# Allegro board front-cover-dvt-0427.brd
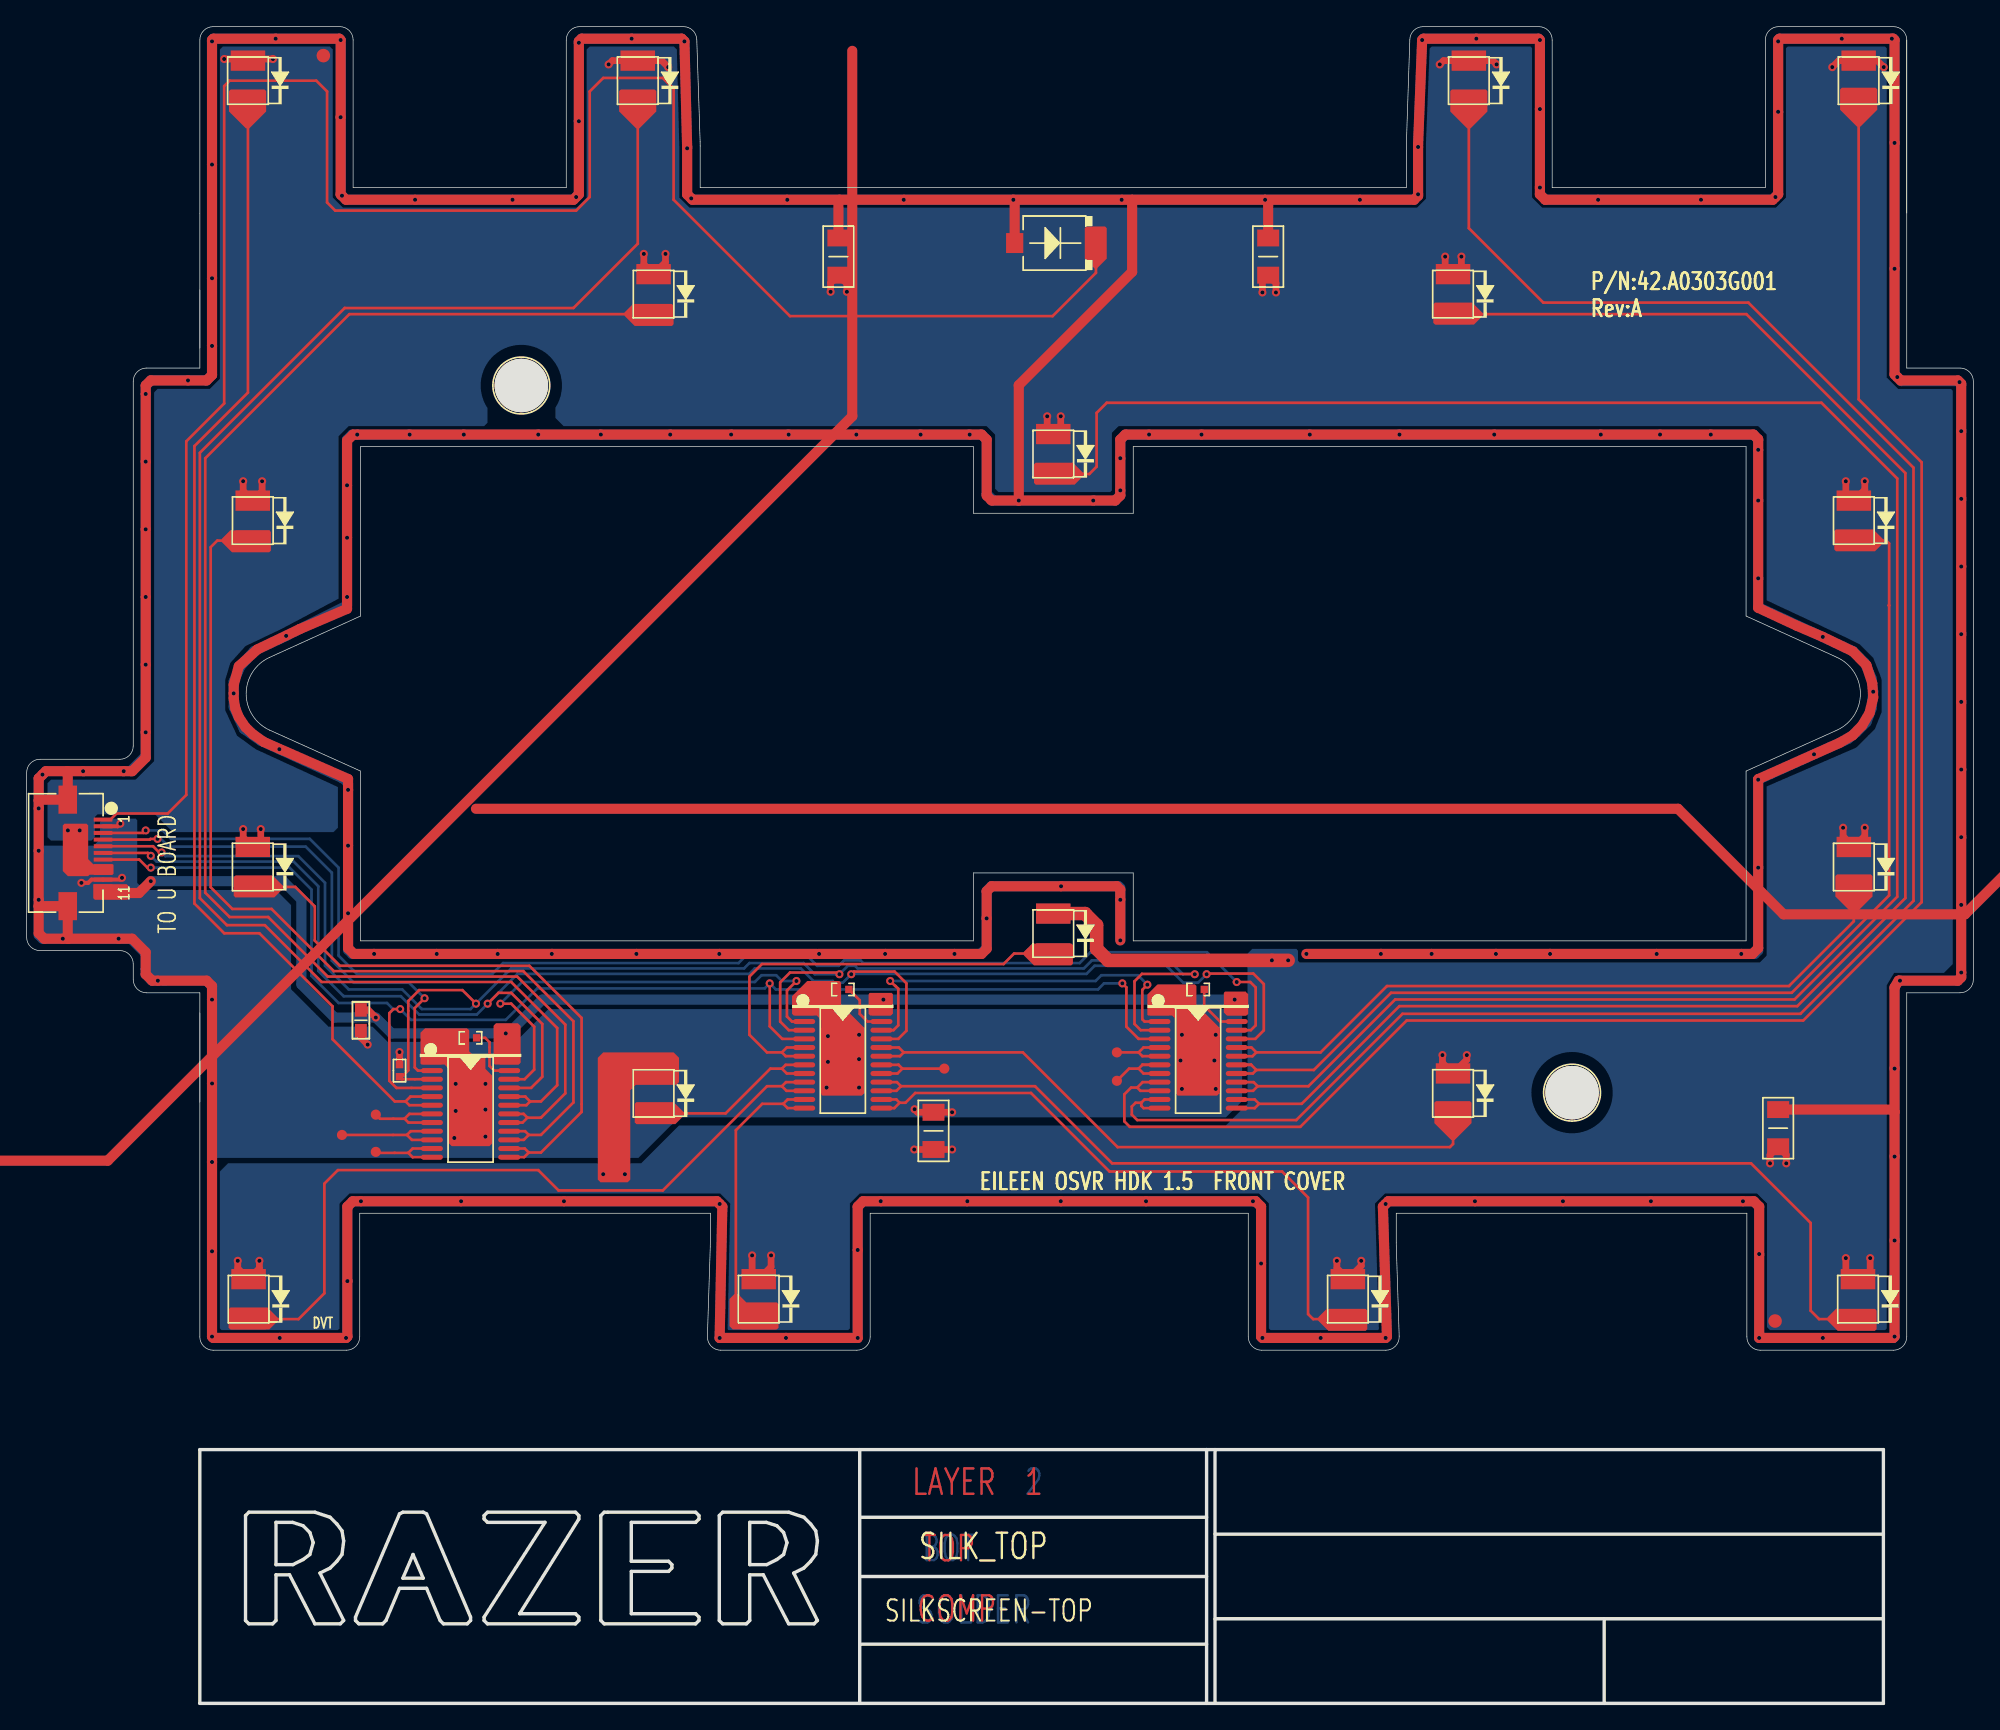
[diagram p0: board, top side]
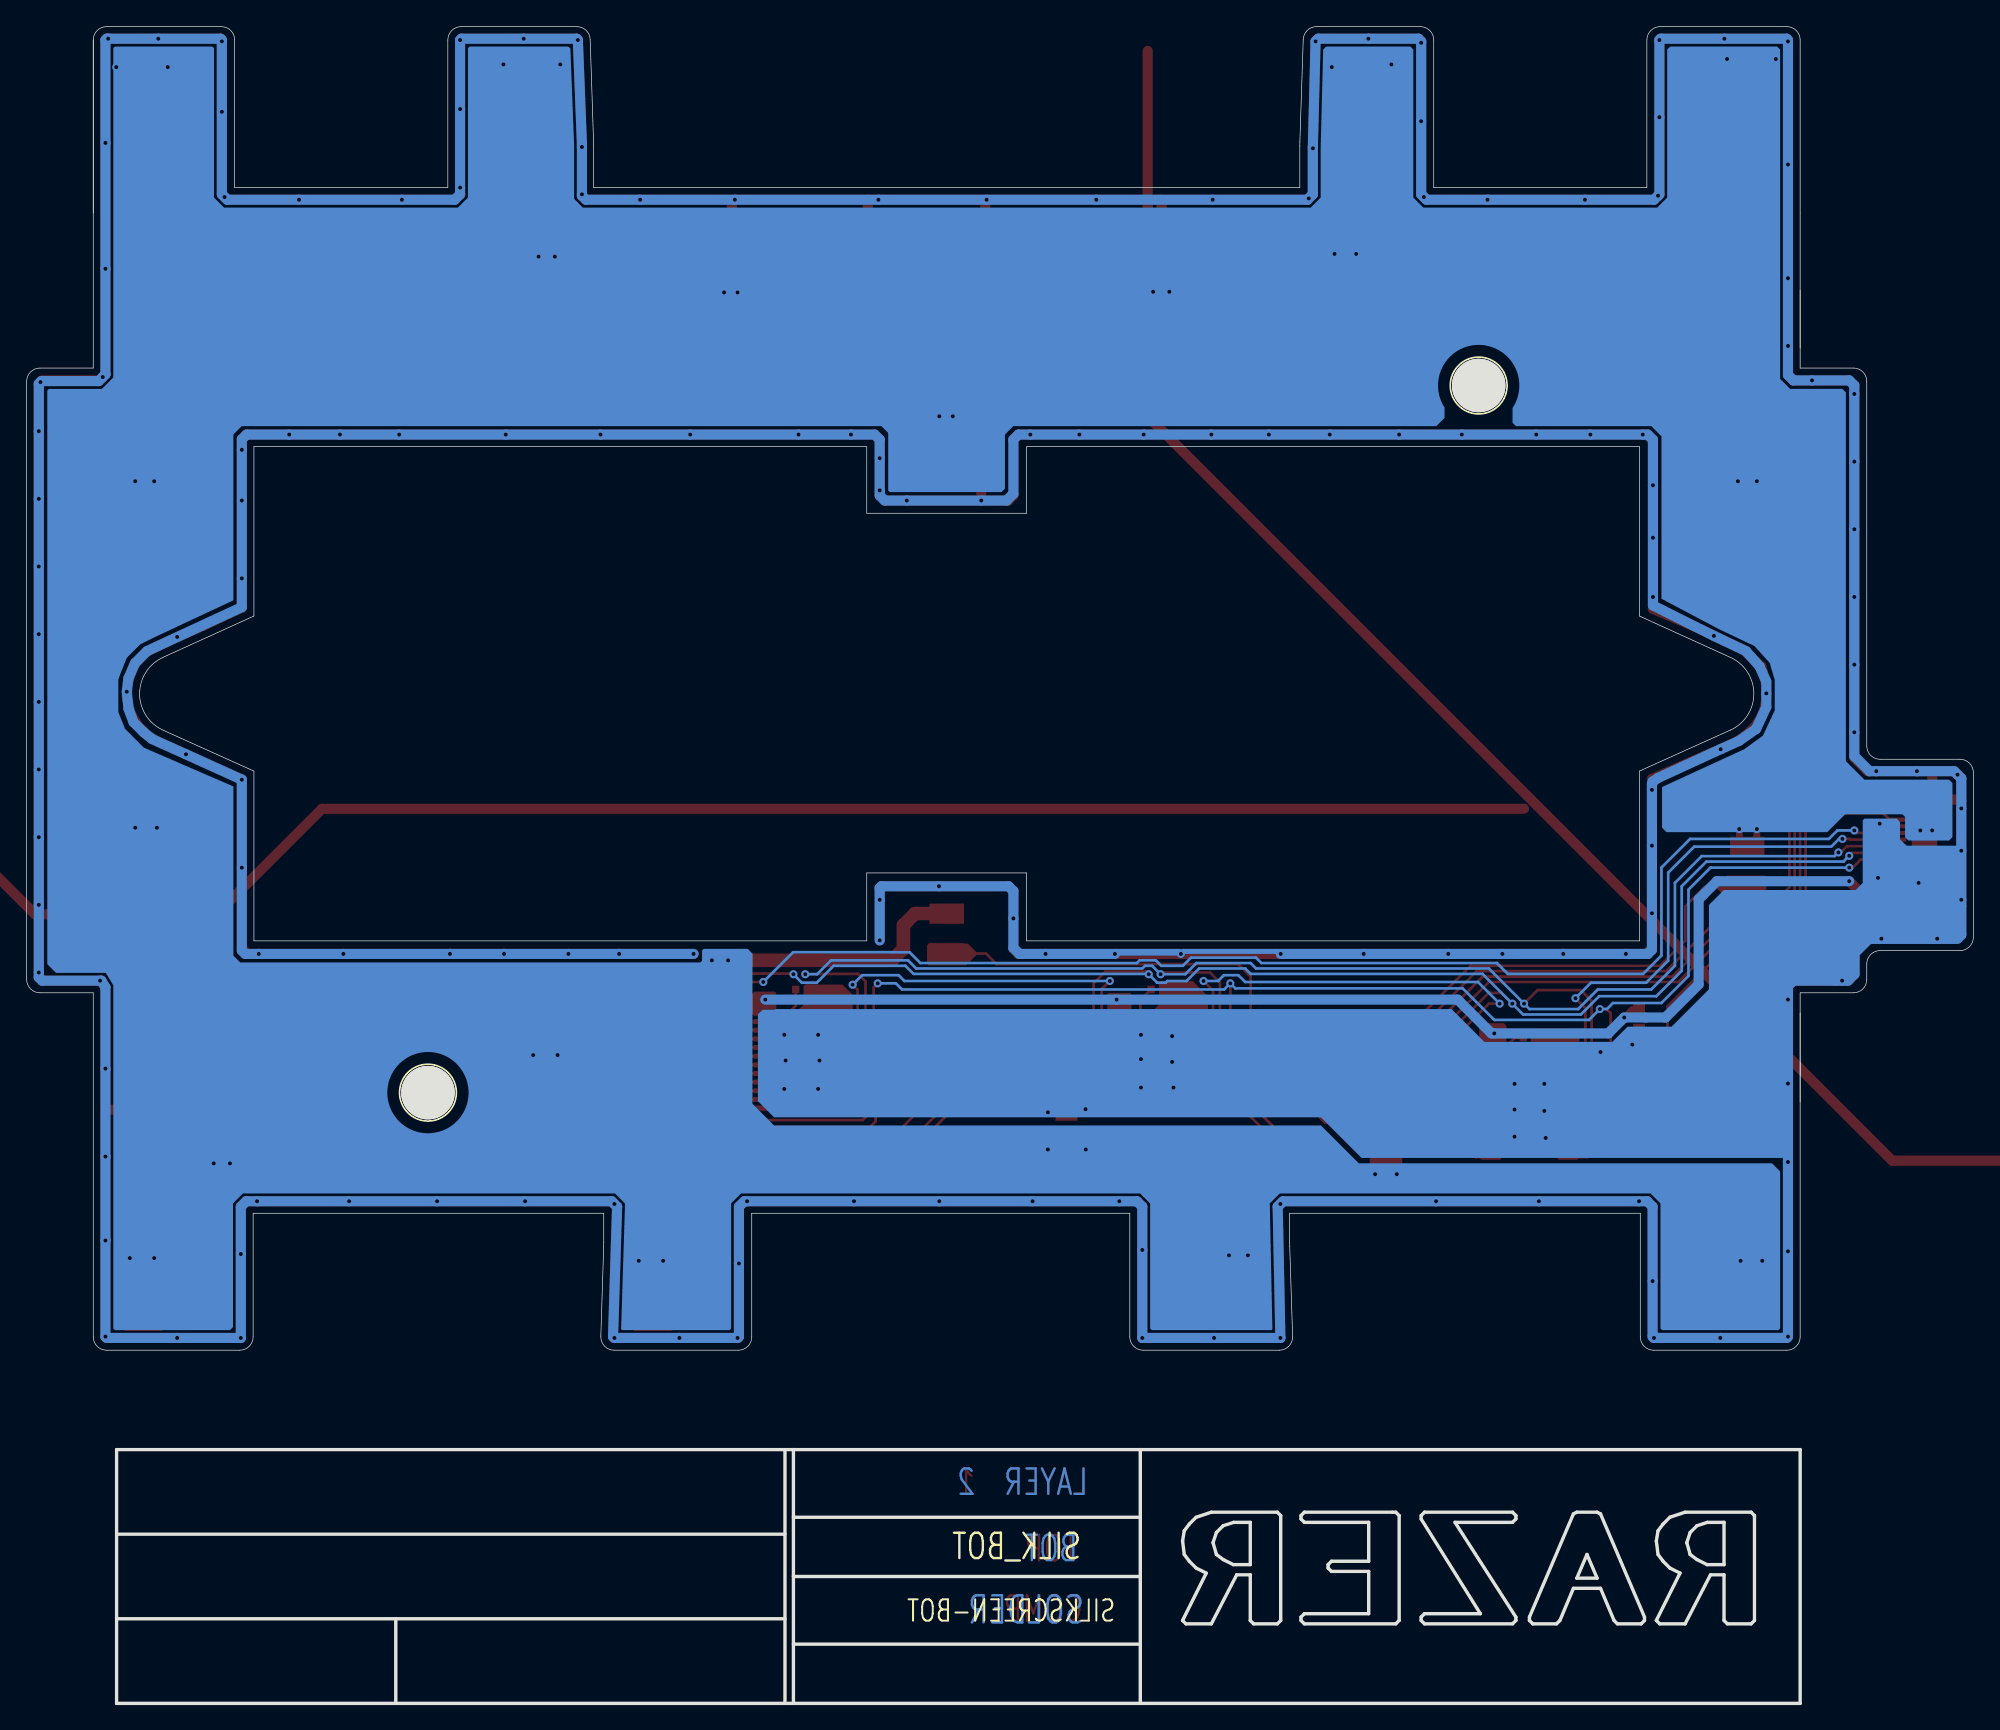
[diagram p1: board, bottom side, seen from below]

Outline 146.12 x 125.87 mm; copper layers: TOP, BOTTOM. Coordinates in mm from the lower left corner of the outline.
Outline path: 13,101.74 13,106.11 ; 13,51.84 13,45.14 ; 140.12,26.51 130.12,26.51 arc(129.41,26.8) 129.12,27.51 129.12,36.79 102.8,36.79 102.8,34.62 arc(102.8,34.46) 102.81,34.31 103.02,27.54 arc(102.74,26.82) 102.02,26.51 92.69,26.51 arc(91.99,26.8) 91.69,27.51 91.69,36.79 63.32,36.79 63.32,27.51 arc(63.02,26.8) 62.32,26.51 52.1,26.51 arc(51.38,26.82) 51.1,27.54 51.31,34.31 arc(51.32,34.46) 51.32,34.62 51.32,36.79 25,36.79 25,27.51 arc(24.71,26.8) 24,26.51 14,26.51 arc(13.29,26.8) 13,27.51 13,53.34 9,53.34 arc(8.29,53.64) 8,54.34 8,55.51 arc(7.71,56.22) 7,56.51 1,56.51 arc(0.29,56.8) 0,57.51 0,69.87 arc(0.29,70.58) 1,70.87 7,70.87 arc(7.71,71.17) 8,71.87 8,99.24 arc(8.29,99.95) 9,100.24 13,100.24 13,124.87 arc(13.29,125.58) 14,125.87 23.5,125.87 arc(24.21,125.58) 24.5,124.87 24.5,113.79 40.5,113.79 40.5,124.87 arc(40.8,125.58) 41.5,125.87 49.3,125.87 arc(50,125.59) 50.3,124.91 50.55,117.23 arc(50.55,117.07) 50.56,116.92 50.56,113.79 103.56,113.79 103.56,116.92 arc(103.56,117.07) 103.57,117.23 103.82,124.91 arc(104.12,125.59) 104.82,125.87 113.5,125.87 arc(114.21,125.58) 114.5,124.87 114.5,113.79 130.5,113.79 130.5,124.87 arc(130.8,125.58) 131.5,125.87 140.12,125.87 arc(140.83,125.58) 141.12,124.87 ; 141.12,124.87 141.12,111.87 ; 141.12,124.87 141.12,100.24 145.12,100.24 arc(145.83,99.95) 146.12,99.24 146.12,54.34 arc(145.83,53.64) 145.12,53.34 141.12,53.34 141.12,27.51 arc(140.83,26.8) 140.12,26.51 ; 18.24,78.52 25.06,81.63 25.06,94.34 71.06,94.34 71.06,89.34 83.06,89.34 83.06,94.34 129.06,94.34 129.06,81.63 135.88,78.52 arc(137.64,75.79) 135.87,73.06 129.06,69.99 129.06,57.24 83.06,57.24 83.06,62.34 71.06,62.34 71.06,57.24 25.06,57.24 25.06,69.99 18.25,73.06 arc(16.48,75.79) 18.24,78.52

## Placement (name value [footprint] x y rotation side)
C301  10uF  [C0603]  25.09 51.28 270 top
C302  47uF  [C1206]  68.07 42.98 90 top
C303  NC_47uF  [C1206]  131.47 43.18 90 top
C304  47uF  [C1206]  93.19 108.61 90 top
C305  NC_47uF  [C1206]  60.93 108.61 90 top
C306  22PF  [C0402]  27.99 47.5 90 top
FPC  TP_1mm  [TPC30T]  77.21 116.84 0 top
J101  FPC-11P-0.5MM  [CHYAO_JS-1191PSDR-11]  5.73 63.84 270 top
LED17  SFH 4253  [OSRAM_SFH4253]  16.61 121.82 0 top
LED21  SFH 4253  [OSRAM_SFH4253]  16.97 62.79 0 top
LED22  SFH 4253  [OSRAM_SFH4253]  16.97 88.79 0 top
LED23  SFH 4253  [OSRAM_SFH4253]  47.06 105.79 0 top
LED24  SFH 4253  [OSRAM_SFH4253]  45.87 121.82 0 top
LED25  SFH 4253  [OSRAM_SFH4253]  77.06 57.79 0 top
LED26  SFH 4253  [OSRAM_SFH4253]  47.06 45.79 0 top
LED27  SFH 4253  [OSRAM_SFH4253]  16.66 30.34 0 top
LED28  SFH 4253  [OSRAM_SFH4253]  54.95 30.34 0 top
LED29  SFH 4253  [OSRAM_SFH4253]  99.17 30.34 0 top
LED30  SFH 4253  [OSRAM_SFH4253]  137.46 30.34 0 top
LED32  SFH 4253  [OSRAM_SFH4253]  107.06 45.79 0 top
LED35  SFH 4253  [OSRAM_SFH4253]  137.51 121.82 0 top
LED36  SFH 4253  [OSRAM_SFH4253]  108.25 121.82 0 top
LED37  SFH 4253  [OSRAM_SFH4253]  107.06 105.79 0 top
LED38  SFH 4253  [OSRAM_SFH4253]  77.06 93.79 0 top
LED39  SFH 4253  [OSRAM_SFH4253]  137.15 88.79 0 top
LED40  SFH 4253  [OSRAM_SFH4253]  137.15 62.79 0 top
LED41  BPW34S-Z  [BPW34S]  77.21 109.63 0 top
M1  HOLEC47040N_NPTH  [HOLEC158D158N]  37.13 98.93 0 top
M2  HOLEC47040N_NPTH  [HOLEC158D158N]  116 45.85 0 top
NOREF  -  [unnamed]  131.24 28.7 0 top
NOREF#2  -  [unnamed]  22.27 123.7 0 top
NOREF#3  -  [#2]  13 0 0 top
R300  330  [R0402]  33.32 49.96 0 top
R301  330  [R0402]  61.26 53.59 0 top
R302  330  [R0402]  87.93 53.59 0 top
TP1  TP_1mm  [TPC30T#2]  26.21 44.2 0 top
TP2  TP_1mm  [TPC30T#2]  23.67 42.67 0 top
TP3  TP_1mm  [TPC30T#2]  26.21 41.4 0 top
TP4  TP_1mm  [TPC30T#2]  68.88 47.65 0 top
TP5  TP_1mm  [TPC30T#2]  81.83 48.87 0 top
TP6  TP_1mm  [TPC30T#2]  81.83 46.74 0 top
U300  STP16CPC26XTR  [TSSOP24-G]  33.32 44.58 270 top
U301  STP16CPC26XTR  [TSSOP24-G]  61.26 48.26 270 top
U302  STP16CPC26XTR  [TSSOP24-G]  87.93 48.26 270 top

## Library data of the parts
C301-C306 = CAP_0
FPC TP1-TP6 = T POINT R
J101 = CON2_5
LED17 LED21-LED30 LED32 LED35-LED40 = LED55BF/TO_3
LED41 = LED55BF/TO_1
M1 M2 = Mounting Hole
R300-R302 = R_RP_3
U300-U302 = STP16CPC26XTR_0

## Footprints (pads in the part's own frame, mm; a bottom-side part is the same pattern mirrored in y, then rotated)
BPW34S
  rect 1.295x1.499 smd: A(-3.05,0)
  rect 1.499x2.108 smd: C(3.05,0)
C0402
  rect 0.559x0.559 smd: 1(-0.457,0) 2(0.457,0)
C0603
  rect 1.016x0.889 smd: 1(-0.775,0) 2(0.775,0)
C1206
  rect 1.27x1.651 smd: 1(-1.397,0) 2(1.397,0)
CHYAO_JS-1191PSDR-11
  rect 0.305x1.397 smd: 1(-2.5,0) 2(-2,0) 3(-1.5,0) 4(-1,0) 5(-0.5,0) 6(0,0) 7(0.5,0) 8(1,0) 9(1.5,0) 10(2,0) 11(2.5,0)
  rect 2.108x1.397 smd: S1(3.998,-2.65) S2(-3.998,-2.65)
HOLEC158D158N
  round 4.013 hole 4.013 unplated: (0,0)
OSRAM_SFH4253
  rect 2.591x1.524 smd: A(0,1.5) C(0,-1.5)
R0402
  rect 0.559x0.559 smd: 1(-0.457,0) 2(0.457,0)
TPC30T
  round 0 smd: 1(0,0)
TPC30T#2
  round 0.762 smd: 1(0,0)
TSSOP24-G
  oval 0.381x1.651 smd: 1(-3.575,-2.9) 2(-2.925,-2.9) 3(-2.275,-2.9) 4(-1.625,-2.9) 5(-0.975,-2.9) 6(-0.325,-2.9) 7(0.325,-2.9) 8(0.975,-2.9) 9(1.625,-2.9) 10(2.275,-2.9) 11(2.925,-2.9) 12(3.575,-2.9) 13(3.575,2.9) 14(2.925,2.9) 15(2.275,2.9) 16(1.625,2.9) 17(0.975,2.9) 18(0.325,2.9) 19(-0.325,2.9) 20(-0.975,2.9) 21(-1.625,2.9) 22(-2.275,2.9) 23(-2.925,2.9) 24(-3.575,2.9)
  rect 4.978x3.2 smd: 25(0,0)
unnamed
  round 1.016 smd: 1(0,0)

## Nets
2.8V_FPC_F: C302.1 C303.1 C304.1 C305.1 J101.8 J101.9 LED17.A(ANODE) LED21.A(ANODE) LED22.A(ANODE) LED23.A(ANODE) LED24.A(ANODE) LED25.A(ANODE) LED26.A(ANODE) LED27.A(ANODE) LED28.A(ANODE) LED29.A(ANODE) LED30.A(ANODE) LED32.A(ANODE) LED35.A(ANODE) LED36.A(ANODE) LED37.A(ANODE) LED38.A(ANODE) LED39.A(ANODE) LED40.A(ANODE)
3.3V_FPC_F: C301.1 J101.11 U300.24(VDD) U301.24(VDD) U302.24(VDD)
DGND_FPC_F: C301.2 C302.2 C303.2 C304.2 C305.2 C306.2 J101.2 J101.10 J101.S1 J101.S2 LED41.A(ANODE) R300.1(L) R301.1(L) R302.1(L) U300.1(GND) U300.25(THM_G) U301.1(GND) U301.25(THM_G) U302.1(GND) U302.25(THM_G)
DRVCLK_FPC_F: C306.1 J101.5 U300.3(CLK) U301.3(CLK) U302.3(CLK)
IR_LED_IN_F: J101.1 LED41.C(CATHODE)
LATEN_FPC_F: J101.7 U300.4(LE) U301.4(LE) U302.4(LE)
LED17: LED17.C(CATHODE) U300.5(OD0) U300.6(OD1)
LED18: TP1.1(TP) U300.7(OD2) U300.8(OD3)
LED19: TP2.1(TP) U300.9(OD4) U300.10(OD5)
LED20: TP3.1(TP) U300.11(OD6) U300.12(OD7)
LED21: LED21.C(CATHODE) U300.13(OD8) U300.14(OD9)
LED22: LED22.C(CATHODE) U300.15(OD10) U300.16(OD11)
LED23: LED23.C(CATHODE) U300.17(OD12) U300.18(OD13)
LED24: LED24.C(CATHODE) U300.19(OD14) U300.20(OD15)
LED25: LED25.C(CATHODE) U301.5(OD0) U301.6(OD1)
LED26: LED26.C(CATHODE) U301.7(OD2) U301.8(OD3)
LED27: LED27.C(CATHODE) U301.9(OD4) U301.10(OD5)
LED28: LED28.C(CATHODE) U301.11(OD6) U301.12(OD7)
LED29: LED29.C(CATHODE) U301.13(OD8) U301.14(OD9)
LED30: LED30.C(CATHODE) U301.15(OD10) U301.16(OD11)
LED31: TP4.1(TP) U301.17(OD12) U301.18(OD13)
LED32: LED32.C(CATHODE) U301.19(OD14) U301.20(OD15)
LED33: TP5.1(TP) U302.5(OD0) U302.6(OD1)
LED34: TP6.1(TP) U302.7(OD2) U302.8(OD3)
LED35: LED35.C(CATHODE) U302.9(OD4) U302.10(OD5)
LED36: LED36.C(CATHODE) U302.11(OD6) U302.12(OD7)
LED37: LED37.C(CATHODE) U302.13(OD8) U302.14(OD9)
LED38: LED38.C(CATHODE) U302.15(OD10) U302.16(OD11)
LED39: LED39.C(CATHODE) U302.17(OD12) U302.18(OD13)
LED40: LED40.C(CATHODE) U302.19(OD14) U302.20(OD15)
OUTEN_FPC_F: J101.6 U300.21(O\E\) U301.21(O\E\) U302.21(O\E\)
R_EXT_F1: R300.2(R) U300.23(R-EXT)
R_EXT_F2: R301.2(R) U301.23(R-EXT)
R_EXT_F3: R302.2(R) U302.23(R-EXT)
SDI_FPC_F: J101.4 U300.2(SDI)
SDO_FPC_F_101: U300.22(SDO) U301.2(SDI)
SDO_FPC_F_102: U301.22(SDO) U302.2(SDI)
SDO_FPC_F_103: J101.3 U302.22(SDO)

Pads without a net: FPC 1; NOREF 1; NOREF#2 1

## Via types
v1: diameter 0.61, hole 0.305, TOP to BOTTOM, 260 vias

## Routing (per net, layer and track width the routed paths; a pad name or vN(x,y) marks a point on that pad's centre or on a via; arc(x,y) is an arc through that point)
2.8V_FPC_F: length 92
  TOP w0.508: v1(55.88,33.63) 55.88,32.77 LED28.A 54.45,32.34 v1(54.45,33.63) ; v1(17.67,91.74) 17.67,90.99 LED22.A 16.25,91.01 v1(16.25,91.74) ; v1(16.25,65.63) 16.25,65.01 LED21.A 17.57,64.89 v1(17.57,65.63) ; v1(106.47,108.61) 106.47,107.88 LED37.A 107.69,107.92 v1(107.69,108.61) ; v1(76.6,96.62) 76.6,95.75 LED38.A 77.62,95.85 v1(77.62,96.62) ; v1(136.55,33.43) 136.55,32.41 137.11,31.84 LED30.A 137.81,31.84 138.37,32.41 v1(138.37,33.43) ; v1(46.32,108.81) 46.32,108.02 LED23.A 47.95,108.18 v1(47.95,108.81) ; v1(137.97,65.74) 137.97,65.11 LED40.A 136.34,65.09 v1(136.34,65.74) ; v1(139.39,122.83) 138.9,123.32 LED35.A 136.02,123.32 v1(135.53,122.83) ; v1(61.56,105.97) 61.56,106.58 C305.1 60.35,106.63 v1(60.35,105.97) ; v1(100.17,33.22) 100.17,32.85 LED29.A 98.34,32.67 v1(98.34,33.22) ; v1(106.27,48.67) 106.27,48.08 LED32.A 108.1,48.33 v1(108.1,48.67) ; v1(15.84,33.22) 15.84,32.66 LED27.A 17.47,32.66 v1(17.47,33.22) ; v1(136.55,91.74) 136.55,90.89 LED39.A 137.97,91.11 v1(137.97,91.74) ; v1(14.83,123.44) 16.49,123.44 LED17.A 16.73,123.44 v1(18.49,123.44) ; v1(106.07,123.04) 106.35,123.32 LED36.A 110.05,123.32 v1(110.33,123.04) ; v1(93.77,105.92) 93.77,106.63 C304.1 92.76,106.78 v1(92.76,105.92) ; v1(130.86,40.54) 130.86,41.17 C303.1 132.08,41.17 v1(132.08,40.54) ; v1(48.15,122.83) 47.67,123.32 LED24.A 43.97,123.32 v1(43.68,123.04) ; v1(69.46,41.58) C302.1 v1(66.62,41.58)
  TOP w1.016: v1(94.69,55.78) v1(93.47,55.78) 81.17,55.78 80.31,56.64 80.31,58.42 79.44,59.29 LED25.A
  vias: v1(3.09,65.53) v1(3.98,65.53) v1(43.28,39.73) v1(44.9,39.73)
3.3V_FPC_F: length 95.2
  TOP w0.381: 64.16,52.68 v1(64.31,52.83)
  TOP w0.508: v1(26.21,51.49) 25.64,52.06 C301.1
  TOP w0.762: v1(9.32,61.72) 8.43,60.83 6.9,60.83
  BOTTOM w0.762: v1(9.32,61.72) 19.25,61.72 20.62,60.35 20.62,53.98 23.11,51.49 v1(26.21,51.49) 27.4,50.29 v1(35.96,50.29) 36.16,50.29 38.7,52.83 v1(64.31,52.83) v1(90.67,52.83)
DGND_FPC_F: length 1914.9
  TOP w0.305: v1(4.11,61.6) 4.62,61.6 4.87,61.84 J101.10 7.03,61.84 v1(7.16,61.98) ; v1(7.03,66.04) 6.83,65.84 J101.2
  TOP w0.381: U301.25 61.26,51.07 60.8,51.52 ; R301.1 60.8,51.52 ; 60.8,51.52 60.57,51.75
  TOP w0.508: C306.2 v1(27.99,48.9) ; C301.2 25.09,49.96 v1(25.6,49.45) ; v1(66.64,44.6) 66.87,44.37 C302.2 v1(69.46,44.37)
  TOP w0.762: 61.01,112.88 60.93,112.8 C305.2 ; 61.01,112.88 v1(57.09,112.88) 49.98,112.88 v1(49.88,112.98) 49.58,113.28 v1(49.58,116.74) 49.58,116.84 v1(49.37,124.76) 49.17,124.97 v1(45.41,124.97) 41.65,124.97 41.45,124.76 v1(41.45,124.66) v1(41.45,118.77) 41.45,113.28 v1(41.24,113.08) 41.04,112.88 v1(36.47,112.88) v1(29.15,112.88) 23.97,112.88 v1(23.67,113.18) 23.57,113.28 v1(23.57,119.08) v1(23.57,124.87) 23.46,124.97 v1(18.69,124.97) 14.02,124.97 13.91,124.87 v1(13.91,124.76) v1(13.91,115.52) v1(13.91,106.98) v1(13.91,101.9) 13.91,99.72 13.51,99.31 v1(12.11,99.31) 9.32,99.31 8.94,98.93 v1(8.94,98.3) v1(8.94,93.22) v1(8.94,88.14) v1(8.94,83.06) v1(8.94,77.98) v1(8.94,72.9) 8.94,70.99 7.92,69.98 v1(7.28,69.98) v1(4.24,69.98) 3.04,69.98 ; 61.01,112.88 v1(65.83,112.88) v1(74.06,112.88) ; v1(74.47,90.3) v1(80.06,90.3) 81.71,90.3 82.09,90.68 v1(82.09,91.06) v1(82.09,93.47) 82.09,94.87 82.47,95.25 v1(84.25,95.25) v1(88.18,95.25) v1(96.31,95.25) v1(103.04,95.25) v1(110.15,95.25) v1(118.16,95.25) v1(122.6,95.25) v1(126.41,95.25) 129.61,95.25 129.97,94.89 v1(129.97,94.11) v1(129.97,90.3) v1(129.97,84.45) 129.97,82.25 132.86,80.9 v1(134.82,80.06) 137.08,78.97 138.09,77.93 138.53,76.58 138.6,75.51 138.32,74.35 137.76,73.41 137.05,72.67 136.09,72.11 129.99,69.39 129.97,69.37 v1(129.97,69.34) v1(129.97,62.74) 129.97,56.69 129.54,56.26 v1(128.7,56.26) v1(122.35,56.26) v1(114.35,56.26) v1(110.28,56.26) v1(105.46,56.26) v1(101.65,56.26) v1(96.06,56.26) ; v1(74.47,90.3) 74.47,98.96 82.98,107.47 82.98,112.88 ; v1(74.47,90.3) 72.44,90.3 72.05,90.68 72.05,94.87 71.67,95.25 v1(70.78,95.25) v1(67.1,95.25) v1(62.28,95.25) v1(57.2,95.25) v1(52.88,95.25) v1(48.31,95.25) v1(43.1,95.25) v1(38.4,95.25) v1(32.81,95.25) v1(28.75,95.25) v1(24.81,95.25) 24.51,95.25 24.05,94.79 v1(24.05,91.44) v1(24.05,87.5) v1(24.05,83.06) 24.05,82.17 20.49,80.65 17.32,79.12 15.92,77.85 15.54,76.45 v1(15.54,75.82) 15.54,75.44 15.67,74.68 15.92,74.04 16.43,73.28 16.99,72.75 17.83,72.16 24.13,69.39 v1(24.13,68.58) v1(24.13,64.39) v1(24.13,59.31) 24.13,56.69 24.56,56.26 v1(26.08,56.26) v1(30.78,56.26) v1(35.35,56.26) v1(39.42,56.26) v1(45.77,56.26) v1(51.99,56.26) v1(59.48,56.26) v1(64.43,56.26) v1(69.64,56.26) 71.67,56.26 72.05,56.64 v1(72.05,58.93) 72.05,60.96 72.44,61.34 v1(77.64,61.34) 81.83,61.34 82.09,61.09 v1(82.09,60.33) v1(82.09,57.28) ; 0.9,67.77 0.98,67.84 J101.S2 3.08,69.94 3.04,69.98 ; 0.9,67.77 0.9,69.44 v1(1.19,69.72) 1.44,69.98 3.04,69.98 ; 0.9,67.77 v1(0.9,67.18) v1(0.9,64.01) v1(0.9,60.33) 0.9,59.84 ; C303.2 140.03,44.58 140.2,44.4 ; v1(74.06,112.88) 74.16,112.78 LED41.A ; v1(74.06,112.88) v1(82.19,112.88) 82.98,112.88 ; 140.2,44.4 v1(140.2,41.05) v1(140.2,34.75) v1(140.2,27.53) 140.1,27.43 v1(134.82,27.43) v1(130.04,27.43) v1(130.04,33.73) 130.04,37.29 129.64,37.69 v1(128.82,37.69) v1(121.92,37.69) v1(115.31,37.69) v1(108.71,37.69) 102.2,37.69 v1(102,37.49) 101.8,37.29 102.1,27.53 v1(102,27.43) v1(97.12,27.43) v1(92.76,27.43) 92.65,27.53 v1(92.65,33.02) 92.65,37.29 92.25,37.69 v1(92.04,37.69) v1(84.02,37.69) v1(77.62,37.69) v1(70.61,37.69) v1(64.1,37.69) 62.78,37.69 62.38,37.29 v1(62.38,34.04) v1(62.38,27.43) v1(56.99,27.43) v1(52.01,27.43) 52.22,37.29 v1(52.01,37.49) 51.81,37.69 v1(40.33,37.69) v1(32.61,37.69) v1(25.09,37.69) 24.48,37.69 24.07,37.29 v1(24.07,31.7) 24.07,27.53 v1(23.97,27.43) v1(18.99,27.43) 14.02,27.43 v1(13.91,27.53) v1(13.91,33.93) v1(13.91,40.64) v1(13.91,46.53) v1(13.91,52.83) 13.91,53.85 13.51,54.25 v1(9.85,54.25) 9.42,54.25 8.94,54.74 8.94,56.39 7.92,57.4 v1(6.9,57.4) 3.09,57.4 ; 140.2,44.4 v1(140.2,47.65) 140.2,53.75 140.51,54.25 v1(140.61,54.25) 144.95,54.25 145.21,54.51 v1(145.21,54.86) v1(145.21,59.94) v1(145.21,65.02) v1(145.21,70.1) v1(145.21,75.18) v1(145.21,80.26) v1(145.21,85.34) v1(145.21,90.42) v1(145.21,95.5) 145.21,99.06 v1(145.08,99.19) 144.95,99.31 140.66,99.31 v1(140.41,99.57) 140.2,99.77 v1(140.2,107.7) v1(140.2,117.14) 140.2,124.87 140.1,124.97 v1(140,124.97) v1(136.24,124.97) 131.57,124.97 131.47,124.87 v1(131.47,124.76) v1(131.47,119.48) 131.47,113.28 v1(131.26,113.08) 131.06,112.88 v1(125.67,112.88) v1(117.95,112.88) 113.99,112.88 113.58,113.28 v1(113.58,113.79) v1(113.58,119.68) v1(113.58,124.87) 113.48,124.97 v1(108.81,124.97) 104.85,124.97 v1(104.74,124.87) 104.44,117.04 v1(104.44,116.84) v1(104.44,113.28) 104.44,113.18 104.14,112.88 v1(100.07,112.88) v1(92.96,112.88) ; 0.9,59.84 0.91,59.85 J101.S1 3.08,57.41 3.09,57.4 ; 0.9,59.84 0.9,57.82 1.32,57.4 v1(2.71,57.4) 3.09,57.4 ; v1(92.96,112.88) 82.98,112.88 ; v1(92.96,112.88) 93.19,112.65 C304.2
  BOTTOM w0.381: v1(59.48,56.26) 59.29,56.45 52.18,56.45 v1(51.99,56.26)
  BOTTOM w0.508: v1(64.43,56.26) 64.31,56.39 59.61,56.39 v1(59.48,56.26)
  BOTTOM w0.762: v1(82.09,57.28) v1(82.09,60.33) 82.09,61.21 81.96,61.34 v1(77.64,61.34) 72.41,61.34 72.05,60.99 v1(72.05,58.93) 72.05,56.72 71.6,56.26 v1(69.64,56.26) v1(64.43,56.26) ; v1(96.06,56.26) v1(101.65,56.26) v1(105.46,56.26) v1(110.28,56.26) v1(114.35,56.26) v1(122.35,56.26) v1(128.7,56.26) 129.71,56.26 129.97,56.52 v1(129.97,62.74) v1(129.97,69.34) v1(134.16,71.25) 136.7,72.39 137.33,72.9 138.09,73.66 138.48,74.68 v1(138.6,75.95) 138.48,76.96 137.97,78.11 137.08,78.99 129.97,82.3 v1(129.97,84.45) v1(129.97,90.3) v1(129.97,94.11) 129.97,94.89 129.61,95.25 v1(126.41,95.25) v1(122.6,95.25) v1(118.16,95.25) v1(110.15,95.25) v1(103.04,95.25) v1(96.31,95.25) v1(88.18,95.25) v1(84.25,95.25) 82.47,95.25 82.09,94.87 v1(82.09,93.47) v1(82.09,91.06) 82.09,90.68 81.71,90.3 v1(80.06,90.3) v1(74.47,90.3) 72.56,90.3 72.05,90.81 72.05,94.87 71.67,95.25 v1(70.78,95.25) v1(67.1,95.25) v1(62.28,95.25) v1(57.2,95.25) v1(52.88,95.25) v1(48.31,95.25) v1(43.1,95.25) v1(38.4,95.25) v1(32.81,95.25) v1(28.75,95.25) v1(24.81,95.25) 24.43,95.25 24.05,94.87 v1(24.05,91.44) v1(24.05,87.5) v1(24.05,83.06) 24.05,82.42 v1(19.48,80.14) 17.06,78.99 16.05,77.85 15.54,76.71 v1(15.54,75.82) 15.54,74.8 16.3,73.15 17.57,72.26 v1(18.97,71.63) 23.67,69.47 24.07,69.2 24.1,69.04 24.13,69.01 v1(24.13,68.58) v1(24.13,64.39) v1(24.13,59.31) 24.13,56.57 24.43,56.26 v1(26.08,56.26) v1(30.78,56.26) v1(35.35,56.26) v1(39.42,56.26) v1(45.77,56.26) v1(51.99,56.26) ; 49.17,124.97 v1(49.37,124.76) 49.58,116.84 v1(49.58,116.74) 49.58,113.28 v1(49.88,112.98) 49.98,112.88 v1(57.09,112.88) v1(65.83,112.88) v1(74.06,112.88) v1(82.19,112.88) v1(92.96,112.88) v1(100.07,112.88) 104.14,112.88 104.44,113.18 v1(104.44,113.28) v1(104.44,116.84) 104.44,117.04 v1(104.74,124.87) 104.85,124.97 v1(108.81,124.97) 113.48,124.97 v1(113.58,124.87) v1(113.58,119.68) v1(113.58,113.79) 113.58,113.28 113.99,112.88 v1(117.95,112.88) v1(125.67,112.88) 131.06,112.88 v1(131.26,113.08) 131.47,113.28 v1(131.47,119.48) v1(131.47,124.76) 131.47,124.87 131.57,124.97 v1(136.24,124.97) v1(140,124.97) 140.1,124.97 140.2,124.87 v1(140.2,117.14) v1(140.2,107.7) 140.2,99.77 v1(140.41,99.57) 140.71,99.26 145,99.26 v1(145.08,99.19) 145.21,99.06 v1(145.21,95.5) v1(145.21,90.42) v1(145.21,85.34) v1(145.21,80.26) v1(145.21,75.18) v1(145.21,70.1) v1(145.21,65.02) v1(145.21,59.94) v1(145.21,54.86) 145.21,54.51 144.95,54.25 v1(140.61,54.25) 140.51,54.25 140.2,53.75 v1(140.2,47.65) v1(140.2,41.05) v1(140.2,34.75) v1(140.2,27.53) 140.1,27.43 v1(134.82,27.43) v1(130.04,27.43) v1(130.04,33.73) 130.04,37.29 129.64,37.69 v1(128.82,37.69) v1(121.92,37.69) v1(115.31,37.69) v1(108.71,37.69) 102.2,37.69 v1(102,37.49) 101.8,37.29 102.1,27.53 v1(102,27.43) v1(97.12,27.43) v1(92.76,27.43) 92.65,27.53 v1(92.65,33.02) 92.65,37.29 92.25,37.69 v1(92.04,37.69) v1(84.02,37.69) v1(77.62,37.69) v1(70.61,37.69) v1(64.1,37.69) 62.78,37.69 62.38,37.29 v1(62.38,34.04) v1(62.38,27.43) v1(56.99,27.43) v1(52.01,27.43) 52.22,37.29 v1(52.01,37.49) 51.81,37.69 v1(40.33,37.69) v1(32.61,37.69) v1(25.09,37.69) 24.48,37.69 24.07,37.29 v1(24.07,31.7) 24.07,27.53 v1(23.97,27.43) v1(18.99,27.43) 14.02,27.43 v1(13.91,27.53) v1(13.91,33.93) v1(13.91,40.64) v1(13.91,46.53) v1(13.91,52.83) 13.91,53.85 13.51,54.25 v1(9.85,54.25) 9.42,54.25 8.94,54.74 8.94,56.39 7.92,57.4 v1(6.9,57.4) v1(2.71,57.4) 1.19,57.4 0.9,57.69 v1(0.9,60.33) v1(0.9,64.01) v1(0.9,67.18) 0.9,69.44 v1(1.19,69.72) 1.44,69.98 v1(4.24,69.98) v1(7.28,69.98) 7.79,69.98 8.94,71.12 v1(8.94,72.9) v1(8.94,77.98) v1(8.94,83.06) v1(8.94,88.14) v1(8.94,93.22) v1(8.94,98.3) 8.94,98.93 9.32,99.31 v1(12.11,99.31) 13.51,99.31 13.91,99.72 v1(13.91,101.9) v1(13.91,106.98) v1(13.91,115.52) v1(13.91,124.76) 13.91,124.87 14.02,124.97 v1(18.69,124.97) 23.46,124.97 v1(23.57,124.87) v1(23.57,119.08) 23.57,113.28 v1(23.67,113.18) 23.97,112.88 v1(29.15,112.88) v1(36.47,112.88) 41.04,112.88 v1(41.24,113.08) 41.45,113.28 v1(41.45,118.77) v1(41.45,124.66) 41.45,124.76 41.65,124.97 v1(45.41,124.97) 49.17,124.97
  vias: v1(32.1,42.44) v1(32.2,46.51) v1(32.2,44.48) v1(34.44,46.51) v1(34.44,44.58) v1(34.44,42.55) v1(60.04,46.23) v1(60.14,50.09) v1(60.14,48.16) v1(62.48,50.19) v1(62.48,48.36) v1(62.48,46.23) v1(86.61,48.26) v1(86.71,50.19) v1(86.71,46.13) v1(89.15,48.26) v1(89.25,50.19) v1(89.25,46.13)
DRVCLK_FPC_F: length 127.7
  TOP w0.203: v1(10.13,63.88) 9.95,63.88 9.49,64.34 J101.5 ; v1(33.73,52.53) 32.71,53.54 29.46,53.54 28.65,52.73 28.65,47.52 28.16,47.04 C306.1 28.17,46.85 U300.3 ; v1(61.01,54.74) 60.88,54.86 57.3,54.86 56.56,54.13 56.56,51.18 57.21,50.54 U301.3 ; U302.3 83.62,50.54 83.15,51 83.15,54.2 83.71,54.76 87.65,54.76 v1(87.68,54.74)
  BOTTOM w0.203: v1(87.68,54.74) 86.79,54.74 85.75,55.78 79.96,55.78 79.35,55.17 62.38,55.17 62.17,55.37 61.64,55.37 v1(61.01,54.74) 59.15,54.74 58.31,55.58 54.25,55.58 53.84,55.17 36.37,55.17 v1(33.73,52.53) 33.32,52.12 29.66,52.12 28.19,53.59 24.18,53.59 22.4,55.37 22.4,61.6 20.39,63.6 10.41,63.6 v1(10.13,63.88)
IR_LED_IN_F: length 160.6
  TOP w0.203: LED41.C 80.26,107.39 77.01,104.14 57.3,104.14 48.56,112.88 48.56,121.21 47.75,122.02 43.28,122.02 42.26,121.01 42.26,113.08 41.24,112.06 23.16,112.06 22.55,112.67 22.55,121.01 21.74,121.82 15.24,121.82 14.83,121.41 14.83,97.59 11.98,94.74 11.98,68.2 10.59,66.8 6.74,66.8 6.28,66.34 J101.1
LATEN_FPC_F: length 108.7
  TOP w0.203: U301.4 56.71,49.89 55.77,50.83 v1(55.77,54.05) ; U300.4 27.76,46.2 27.22,46.74 27.22,51.82 27.53,52.12 v1(28.04,52.12) ; v1(82.24,54.05) 82.55,53.75 82.55,50.8 83.46,49.89 U302.4 ; J101.7 8.46,63.34 9.06,62.74 v1(9.32,62.74)
  BOTTOM w0.203: v1(9.32,62.74) 19.73,62.74 21.38,61.09 21.38,54.61 23.41,52.58 27.05,52.58 27.5,52.12 v1(28.04,52.12) 28.85,51.31 35.96,51.31 38.33,53.67 55.4,53.67 v1(55.77,54.05) 56.23,53.59 80.41,53.59 80.87,54.05 v1(82.24,54.05)
LED17: length 89.6
  TOP w0.203: 28.44,45.19 27.63,45.19 22.96,49.86 22.96,52.32 17.47,57.81 14.83,57.81 12.59,60.05 12.59,94.39 16.61,98.4 LED17.C ; 28.44,45.19 28.81,45.55 U300.5 ; 28.44,45.19 28.73,44.9 U300.6
LED18: length 6.7
  TOP w0.203: U300.8 28.66,43.6 28.37,43.89 ; 28.37,43.89 28.73,44.25 U300.7 ; 28.37,43.89 26.51,43.89 TP1.1
LED19: length 8.9
  TOP w0.203: 28.54,42.67 TP2.1 ; 28.54,42.67 28.91,42.3 U300.10 ; 28.54,42.67 28.82,42.95 U300.9
LED20: length 6.3
  TOP w0.203: U300.12 28.97,41 28.65,41.33 ; 28.65,41.33 26.28,41.33 TP3.1 ; 28.65,41.33 28.97,41.65 U300.11
LED21: length 45.7
  TOP w0.203: LED21.C 20.16,61.29 21.62,59.83 21.62,57.26 23.51,55.37 37.74,55.37 41.65,51.46 41.65,44.4 38.6,41.35 37.69,41.35 ; U300.14 37.39,41.65 37.69,41.35 ; U300.13 37.34,41 37.69,41.35
LED22: length 73.9
  TOP w0.203: U300.15 37.31,42.3 37.69,42.68 ; 37.69,42.68 38.61,42.68 41.04,45.11 41.04,51.2 37.28,54.97 23.06,54.97 18.38,59.64 15.44,59.64 13.81,61.26 13.81,86.79 14.31,87.29 LED22.C ; 37.69,42.68 37.41,42.95 U300.16
LED23: length 113.6
  TOP w0.203: LED23.C 24.22,104.29 13.41,93.47 13.41,60.86 15.24,59.03 18.13,59.03 22.6,54.56 36.82,54.56 40.43,50.95 40.43,45.8 38.6,43.97 37.59,43.97 ; 37.59,43.97 37.22,43.6 U300.17 ; 37.59,43.97 37.3,44.25 U300.18
LED24: length 124.6
  TOP w0.203: 37.79,45.19 38.6,45.19 39.82,46.41 39.82,50.7 36.37,54.15 22.14,54.15 17.88,58.42 15.03,58.42 13,60.45 13,93.88 23.87,104.75 41.04,104.75 45.87,109.58 LED24.C ; 37.79,45.19 37.51,44.9 U300.19 ; 37.79,45.19 37.42,45.55 U300.20
LED25: length 34.5
  TOP w0.203: 56.69,48.87 56.97,48.59 U301.6 ; 56.69,48.87 57.05,49.24 U301.5 ; 56.69,48.87 55.57,48.87 54.25,50.19 54.25,54.56 55.19,55.5 73.32,55.5 74.12,56.29 LED25.C
LED26: length 14.6
  TOP w0.203: 56.69,47.65 55.82,47.65 52.46,44.29 LED26.C ; 56.69,47.65 56.97,47.93 U301.7 ; 56.69,47.65 57.05,47.28 U301.8
LED27: length 57
  TOP w0.203: U301.9 56.99,46.63 56.69,46.33 ; U301.10 57.03,45.98 56.69,46.33 ; 56.69,46.33 55.57,46.33 47.75,38.51 39.92,38.51 38.4,40.03 23.36,40.03 22.35,39.01 22.35,30.78 20.41,28.84 LED27.C
LED28: length 23.6
  TOP w0.203: U301.12 57.11,44.68 56.79,45.01 ; U301.11 57.12,45.33 56.79,45.01 ; 56.79,45.01 55.21,45.01 53.23,43.03 53.23,29.03 53.42,28.84 LED28.C
LED29: length 49.1
  TOP w0.203: U301.14 65.28,45.33 65.53,45.09 ; 65.53,45.09 65.12,44.68 U301.13 ; 65.53,45.09 65.96,45.09 66.7,45.82 75.38,45.82 81.28,39.93 94.23,39.93 96.18,37.97 96.18,29.22 96.57,28.84 LED29.C
LED30: length 86.1
  TOP w0.203: 65.63,46.33 75.69,46.33 81.48,40.54 129.43,40.54 133.9,36.07 133.9,29.48 134.54,28.84 LED30.C ; 65.63,46.33 65.28,45.98 U301.15 ; 65.63,46.33 65.32,46.63 U301.16
LED31: length 6.6
  TOP w0.203: U301.18 65.43,47.93 65.44,47.94 65.73,47.65 ; 65.73,47.65 65.36,47.28 U301.17 ; 65.73,47.65 TP4.1
LED32: length 50.2
  TOP w0.203: 65.83,48.87 65.47,49.24 U301.20 ; 65.83,48.87 74.77,48.87 81.88,41.76 106.83,41.76 107.06,41.99 LED32.C ; 65.83,48.87 65.55,48.59 U301.19
LED33: length 5
  TOP w0.203: TP5.1 83.46,48.87 ; 83.46,48.87 83.74,48.59 U302.6 ; 83.46,48.87 83.83,49.24 U302.5
LED34: length 6.7
  TOP w0.203: TP6.1 82.75,47.65 83.46,47.65 ; 83.74,47.93 83.75,47.94 85.03,47.94 ; 83.74,47.93 83.46,47.65 ; 83.74,47.93 U302.7 ; 83.46,47.65 83.83,47.28 U302.8
LED35: length 136
  TOP w0.203: U302.9 83.76,46.63 83.36,46.23 ; 83.36,46.23 82.9,46.23 82.39,45.72 82.39,43.69 82.8,43.28 95.6,43.28 103.58,51.26 133.35,51.26 142.24,60.15 142.24,93.17 137.51,97.89 LED35.C ; 83.36,46.23 83.6,45.98 U302.10
LED36: length 153.2
  TOP w0.203: LED36.C 108.25,110.75 113.84,105.16 129.23,105.16 141.63,92.76 141.63,60.25 133.14,51.77 103.27,51.77 95.3,43.79 83.36,43.79 82.95,44.2 82.95,44.81 83.24,45.09 83.66,45.09 ; 83.66,45.09 83.66,44.86 83.83,44.68 U302.12 ; 83.66,45.09 83.91,45.33 U302.11
LED37: length 129.3
  TOP w0.203: 92.5,45.01 95.7,45.01 103.03,52.34 132.9,52.34 141.02,60.45 141.02,92.35 129.08,104.29 LED37.C ; 92.5,45.01 92.18,45.33 U302.14 ; 92.5,45.01 92.18,44.68 U302.13
LED38: length 159
  TOP w0.203: 92.4,46.33 92.06,45.98 U302.15 ; 92.4,46.33 96.21,46.33 102.72,52.84 132.69,52.84 140.41,60.55 140.41,91.95 134.72,97.64 81.07,97.64 80.31,96.88 80.31,92.84 79.76,92.29 LED38.C ; 92.4,46.33 92.1,46.63 U302.16
LED39: length 86.4
  TOP w0.203: 91.91,47.93 91.91,47.94 90.83,47.94 ; 91.91,47.93 U302.18 ; 91.91,47.93 92.3,47.55 ; 139.75,82.42 139.8,82.42 ; 139.8,82.42 139.8,87.07 139.58,87.29 LED39.C ; 139.8,82.42 139.8,60.66 132.49,53.35 102.41,53.35 96.62,47.55 92.3,47.55 ; 92.3,47.55 92.03,47.28 U302.17
LED40: length 54.7
  TOP w0.203: 92.3,48.87 91.93,49.24 U302.20 ; 92.3,48.87 92.01,48.58 90.84,48.58 U302.19 ; 92.3,48.87 97.12,48.87 102.1,53.85 132.28,53.85 137.15,58.72 LED40.C
OUTEN_FPC_F: length 127.6
  TOP w0.203: v1(9.32,63.63) 9.1,63.84 J101.6 ; v1(61.89,54.74) 62.09,54.94 65.15,54.94 66.04,54.05 66.04,50.5 65.43,49.89 U301.21 ; U302.21 92.22,49.89 92.86,50.52 92.86,54 92.07,54.79 88.62,54.79 v1(88.56,54.74) ; U300.21 37.87,46.2 38.7,47.04 38.7,51 36.37,53.34 35.42,53.34 v1(34.6,52.53)
  BOTTOM w0.203: v1(88.56,54.74) 87.93,54.1 86.81,54.1 85.54,55.37 80.16,55.37 79.55,54.76 61.92,54.76 v1(61.89,54.74) 61.26,54.1 60.62,54.1 60.5,54.23 59.05,54.23 58.11,55.17 54.66,55.17 54.25,54.76 36.84,54.76 v1(34.6,52.53) 33.79,51.71 29.46,51.71 28.09,53.09 23.79,53.09 21.89,54.99 21.89,61.34 20.04,63.2 9.75,63.2 v1(9.32,63.63)
R_EXT_F1: length 4.5
  TOP w0.203: R300.2 34.41,49.96 34.74,49.63 34.74,47.85 35.09,47.5 U300.23
R_EXT_F2: length 4
  TOP w0.203: R301.2 62.53,52.78 62.53,51.76 63.11,51.19 U301.23
R_EXT_F3: length 4.2
  TOP w0.203: U302.23 89.58,51.19 88.39,52.37 R302.2
SDI_FPC_F: length 39.9
  TOP w0.203: v1(9.82,64.9) 9.29,64.9 9.24,64.84 J101.4 ; v1(29.87,52.93) 29.13,52.2 29.13,47.74 29.37,47.5 U300.2
  BOTTOM w0.203: v1(9.82,64.9) 10.08,64.9 10.66,64.31 20.95,64.31 22.91,62.36 22.91,55.75 24.56,54.1 28.7,54.1 v1(29.87,52.93)
SDO_FPC_F_101: length 36.4
  TOP w0.203: U301.2 57.45,51.19 57.07,51.56 57.07,53.52 v1(57.78,54.23) ; U300.22 37.37,46.85 38.1,47.57 38.1,50.8 36.37,52.53 v1(35.56,52.53)
  BOTTOM w0.203: v1(35.56,52.53) 37.18,54.15 54.66,54.15 55.16,54.66 56.26,54.66 56.69,54.23 v1(57.78,54.23)
SDO_FPC_F_102: length 28.9
  TOP w0.203: U301.22 65.06,50.54 65.43,50.9 65.43,53.64 65.22,53.85 65.19,53.85 v1(64.82,54.23) ; v1(84.12,53.95) 83.74,53.57 83.74,51.35 83.91,51.19 U302.2
  BOTTOM w0.203: v1(84.12,53.95) 83.41,54.66 80.67,54.66 80.23,54.23 v1(64.82,54.23)
SDO_FPC_F_103: length 101.8
  TOP w0.203: v1(90.83,54.15) 91.84,54.15 92.25,53.75 92.25,50.9 91.88,50.54 U302.22 ; J101.3 8.75,65.34 v1(8.94,65.53)
  BOTTOM w0.203: v1(90.83,54.15) 88.59,56.39 79.85,56.39 79.04,55.58 62.78,55.58 62.58,55.78 61.36,55.78 60.96,55.37 59.33,55.37 58.72,55.98 53.84,55.98 53.44,55.58 35.76,55.58 34.95,54.76 24.79,54.76 23.41,56.13 23.41,62.74 21.25,64.9 10.84,64.9 10.21,65.53 v1(8.94,65.53)

## Copper pours and planes (outline as drawn; the poured copper is in the pictures)
2.8V_FPC_F on TOP (solid shape): 48.97,48.46 48.97,46.63 48.76,46.43 45.72,46.43 45.31,46.02 45.31,39.32 45.11,39.12 43.07,39.12 42.87,39.32 42.87,48.46 43.28,48.87 48.56,48.87
2.8V_FPC_F on TOP (solid shape): 4.62,65.91 4.62,63.37 5,62.99 6.47,62.99 6.52,62.94 6.52,62.28 6.45,62.2 4.72,62.2 4.62,62.1 3.09,62.1 2.71,62.48 2.71,65.91 2.84,66.04 4.49,66.04
2.8V_FPC_F on BOTTOM (solid shape): outline of 357 points within 1.57,28.02 144.57,124.38
3.3V_FPC_F on TOP (solid shape): 7.67,61.34 7.67,60.45 7.54,60.33 5.13,60.33 5,60.45 5,61.47 5.02,61.49 7.51,61.49
3.3V_FPC_F on TOP (solid shape): 65.02,53.24 65.02,51.79 64.87,51.64 63.32,51.64 63.19,51.77 63.19,53.24 63.29,53.34 64.92,53.34
3.3V_FPC_F on TOP (solid shape): 91.69,53.24 91.69,51.77 91.56,51.64 90.09,51.64 89.86,51.87 89.86,53.34 89.96,53.44 91.49,53.44
3.3V_FPC_F on TOP (solid shape): 37.08,50.85 37.08,48.11 36.93,47.96 35.15,47.96 35.05,48.06 35.05,50.88 35.22,51.05 36.88,51.05
DGND_FPC_F on TOP (solid shape): 87.8,53.85 87.8,52.45 89.56,50.7 89.56,45.82 89.35,45.62 86.41,45.62 86.3,45.72 86.3,51.31 85.97,51.64 84.17,51.64 84.12,51.69 84.12,53.21 84.88,53.98 87.68,53.98
DGND_FPC_F on TOP (solid shape): 33.22,50.52 33.22,48.95 33.42,48.74 34.23,48.74 34.44,48.54 34.44,47.62 34.95,47.12 34.95,42.04 34.74,41.83 31.9,41.83 31.69,42.04 31.69,47.62 31.36,47.96 29.64,47.96 29.56,48.03 29.56,50.34 29.89,50.67 33.07,50.67
DGND_FPC_F on TOP (solid shape): 61.13,54.1 61.13,52.45 62.89,50.7 62.89,45.82 62.68,45.62 59.74,45.62 59.63,45.72 59.63,51.31 59.3,51.64 57.58,51.64 57.45,51.77 57.45,53.09 58.59,54.23 61.01,54.23
DGND_FPC_F on BOTTOM (solid shape): 8.3,66.29 8.3,61.6 8.83,61.06 18.71,61.06 19.85,59.93 19.85,53.61 22.65,50.8 25.95,50.8 27.1,49.66 36.7,49.66 39.16,52.12 89.91,52.12 89.96,52.07 90.88,52.07 91.23,51.71 91.23,45.21 90.01,43.99 48.97,43.99 45.92,40.94 13.81,40.94 13.81,53.54 13.41,53.95 9.19,53.95 8.55,54.58 8.55,56.13 7.67,57.02 1.32,57.02 0.68,57.66 0.68,64.26 0.81,64.39 5.02,64.39 5.51,64.87 5.51,66.17 5.76,66.42 8.17,66.42
IR_LED_IN_F on TOP (solid shape): 81.07,110.74 81.07,108.46 80.31,107.7 80.18,107.7 79.42,108.46 79.42,110.74 79.55,110.87 80.94,110.87
LED17 on TOP (solid shape): 17.98,121.03 17.98,119.51 16.71,118.24 16.45,118.24 15.18,119.51 15.18,121.03 15.31,121.16 17.85,121.16
LED21 on TOP (solid shape): 19.22,61.39 19.22,61.14 18.59,60.5 15.67,60.5 15.54,60.63 15.54,62.03 15.67,62.15 18.46,62.15
LED22 on TOP (solid shape): 18.33,87.93 18.33,86.54 18.21,86.41 15.41,86.41 14.65,87.17 14.65,87.43 15.29,88.06 18.21,88.06
LED23 on TOP (solid shape): 48.56,104.93 48.56,103.53 48.43,103.4 45.64,103.4 44.88,104.17 44.88,104.42 45.51,105.05 48.43,105.05
LED24 on TOP (solid shape): 47.26,121.03 47.26,119.51 45.99,118.24 45.74,118.24 44.47,119.51 44.47,121.03 44.6,121.16 47.14,121.16
LED25 on TOP (solid shape): 78.53,56.92 78.53,55.52 78.4,55.4 75.61,55.4 74.85,56.16 74.85,56.41 75.48,57.05 78.4,57.05
LED26 on TOP (solid shape): 49.32,44.37 49.32,44.12 48.69,43.48 45.77,43.48 45.64,43.61 45.64,45.01 45.77,45.14 48.56,45.14
LED27 on TOP (solid shape): 18.84,28.96 18.84,28.7 18.21,28.07 15.29,28.07 15.16,28.19 15.16,29.59 15.29,29.72 18.08,29.72
LED28 on TOP (solid shape): 54.02,30.1 56.31,30.1 56.43,29.97 56.43,28.19 56.31,28.07 53,28.07 52.75,28.32 52.75,30.35 53.13,30.73 53.39,30.73
LED29 on TOP (solid shape): 100.63,29.49 100.63,28.09 100.5,27.97 97.71,27.97 96.95,28.73 96.95,28.98 97.58,29.62 100.5,29.62
LED30 on TOP (solid shape): 138.86,29.49 138.86,28.09 138.73,27.97 135.94,27.97 135.17,28.73 135.17,28.98 135.81,29.62 138.73,29.62
LED32 on TOP (solid shape): 108.45,45.09 108.45,43.56 107.18,42.29 106.93,42.29 105.66,43.56 105.66,45.09 105.79,45.21 108.33,45.21
LED35 on TOP (solid shape): 138.91,121.16 138.91,119.63 137.64,118.36 137.38,118.36 136.11,119.63 136.11,121.16 136.24,121.28 138.78,121.28
LED36 on TOP (solid shape): 109.65,121.03 109.65,119.51 108.38,118.24 108.12,118.24 106.85,119.51 106.85,121.03 106.98,121.16 109.52,121.16
LED37 on TOP (solid shape): 109.27,104.39 109.27,104.14 108.63,103.5 105.71,103.5 105.58,103.63 105.58,105.03 105.71,105.16 108.5,105.16
LED38 on TOP (solid shape): 79.29,92.38 79.29,92.13 78.66,91.49 75.74,91.49 75.61,91.62 75.61,93.01 75.74,93.14 78.53,93.14
LED39 on TOP (solid shape): 139.36,87.38 139.36,87.12 138.73,86.49 135.81,86.49 135.68,86.61 135.68,88.01 135.81,88.14 138.6,88.14
LED40 on TOP (solid shape): 138.55,62.1 138.55,60.58 137.28,59.31 137.03,59.31 135.76,60.58 135.76,62.1 135.89,62.23 138.43,62.23

## Text on the board
Ref Des/Silkscreen Top: DVT | EILEEN OSVR HDK 1.5  FRONT COVER | P/N:42.A0303G001 | Rev:A | TO U BOARD
NCLEGEND-1-2: FIGURE | SIZE | 12.0 | 158.0 | DRILL CHART: TOP to BOTTOM | ALL UNITS ARE IN MILS | PLATED | NON-PLATED | QTY | 260 | 2
User.8: 2-\Fgdt;{\Fgdt;n}\Ftxt;4.00(HOLE) | 2-R3.00 | 55.00 | 14.36 | 5.00 | 12.00 | 6.00 | 16.00 | 26.32 | 10.05 | 40.00 | 78.87 | 115.16 | 53.01 | 128.12 | 28.38 | 11.11 | 10.94 | 49deg | 25.12 | 10.61 | 99.36 | 0.20(THICKNESS) | 53.08 | 4.50 | 0.20 | 0.10
User.9: 2-\Fgdt;{\Fgdt;n}\Ftxt;4.00(HOLE) | 2-R3.00 | 55.00 | 14.36 | 5.00 | 12.00 | 16.00 | 26.32 | 10.05 | 78.87 | 115.16 | 53.01 | 128.12 | 28.38 | 11.11 | 10.94 | 49deg | 25.12 | 10.61 | 99.36 | 0.20(THICKNESS) | 53.08 | MP | OSVR FRONT COVE | P/N:42.A0321G002 | Rev:B
